# Altium PCB 枪盒设置板-20201219.PcbDoc
Units mm, origin at the board's own origin, x right, y up, seen from the top; angles counter-clockwise.
Board outline 66 x 20 mm, 2 copper layers (Top Layer, Bottom Layer); 12 components, 9 nets, 39 pads, 37 vias.
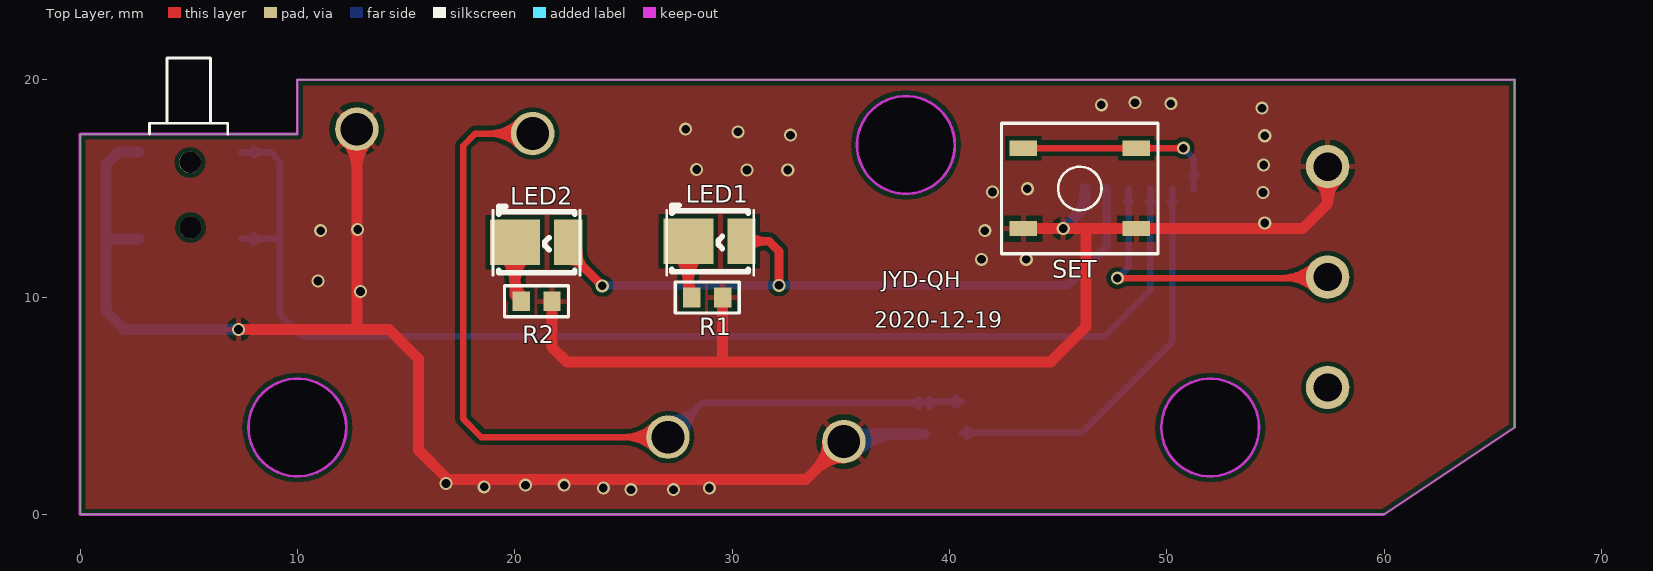
[diagram p0: Top Layer view]
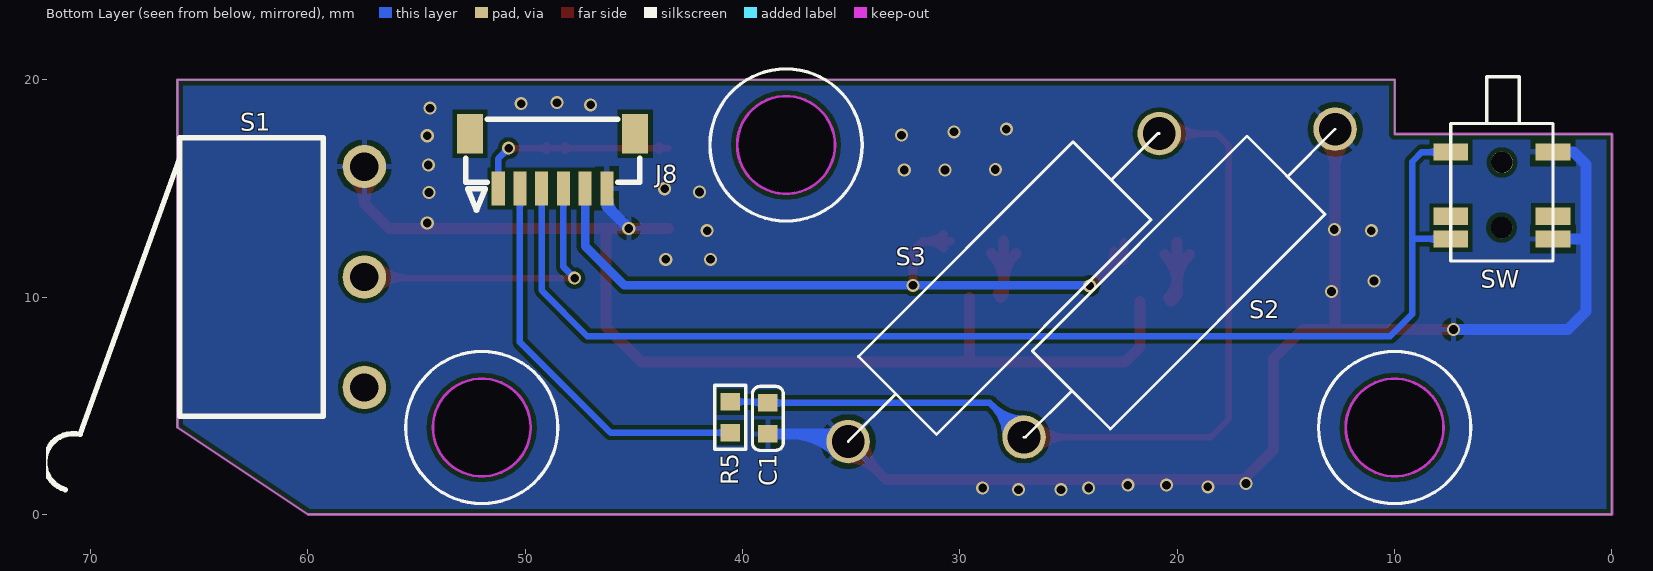
[diagram p1: Bottom Layer view, seen from below]

## Layer stack, top to bottom
Top Layer: signal copper 0.0356
Dielectric: dielectric 0.32, FR-4, Dk 4.8
Bottom Layer: signal copper 0.0356

## Board outline
0,0 60,0 66,4 66,20 10,20 10,17.5 0,17.5
cut-out: 7.75,4 ccw(c10,4) 10,1.75 ccw(c10,4) 12.25,4 ccw(c10,4) 10,6.25 ccw(c10,4)
cut-out: 35.75,17 ccw(c38,17) 38,14.75 ccw(c38,17) 40.25,17 ccw(c38,17) 38,19.25 ccw(c38,17)
cut-out: 49.75,4 ccw(c52,4) 52,1.75 ccw(c52,4) 54.25,4 ccw(c52,4) 52,6.25 ccw(c52,4)

## Design rules (kind name [scope] priority, off if disabled: settings)
Clearance [All] p1: gap=0.2
ComponentClearance [All] p1: gap=0 collisioncheckmode=3 verticalgap=0 showdistances=FALSE
HoleToHoleClearance [All] p1: gap=0 allowstackedmicrovias=TRUE
MinimumSolderMaskSliver [All] p1: minsoldermaskwidth=0
PolygonConnect [All] p1: connectstyle=Relief reliefconductorwidth=0.254 reliefentries=4 polygonreliefangle="90 Angle" airgapwidth=0.254
RoutingVias [All] p1: holewidth=0.4 width=0.6 viastyle="Through Hole" minholewidth=0.3 minwidth=0.5 maxholewidth=0.4 maxwidth=0.6
SilkToSilkClearance [All] p1: silktosilkclearance=0
SilkToSolderMaskClearance [IsPad] p1: minsilkscreentomaskgap=0 clearancetoexposedcopper=TRUE
SolderMaskExpansion [All] p1: expansion=0.102
Width [All] p1: maxlimit=2 minlimit=0.15 preferedwidth=0.2
23 further rules are at their usual default settings.

## Components (designator, comment, footprint, x,y, rotation, side; value= is the part's Value field where it differs from the comment)
C1 "100nF" 0603C 38.837,4.42 r90 bottom
J8 "设置板接口" 6P-1mm 48.743,16.256 r0 bottom
LED1 "white" 2835LED 29.21,12.573 r0 top
LED2 "white" 2835LED 21.234,12.522 r0 top
R1 "1K" 0603R 28.854,9.982 r0 top
R2 "1K" 0603R 21.006,9.804 r0 top
R5 "1K" 0603R 40.564,4.47 r90 bottom
S1 "SW" SW-TH_TC-5610H-T 57.404,10.922 r270 bottom
S2 "M1" 滚珠开关 27.051,3.556 r135 bottom
S3 "M2" 滚珠开关 20.828,17.526 r315 bottom
SET "SW" KEY_5.2*3.7*6.4 46,15 r0 top
SW "SW" ? 7.417,12.675 r180 bottom

## Footprints (in the part's own frame and the unit in brackets; to place one, negate y for a bottom-side part, rotate by r counter-clockwise, add the part's x,y. Pads: shape width x height; smd on the part's side, far side on the other; paste and mask are expansions set on the pad)
6P-1mm [mm]
  rect 0.6x1.55 smd: 1(2.5,1.262) 2(1.5,1.262) 3(0.5,1.262) 4(-0.5,1.262) 5(-1.5,1.262) 6(-2.5,1.262)
  rect 1.2x1.8 smd: 7(-3.8,-1.262) 8(3.8,-1.262)
  silkscreen extent -4,-1.94 4,2.26
0603C [mm]
  rect 0.8x0.9 smd: 1(-0.711,0) 2(0.711,0)
  silkscreen extent -1.47,-0.71 1.47,0.71, body extent -0.8,-0.4 0.8,0.4, height 0.3
0603R [mm]
  rect 0.8x0.9 smd: 1(-0.711,0) 2(0.711,0)
  silkscreen extent -1.47,-0.71 1.47,0.71, body extent -0.85,-0.4 0.85,0.4, height 0.56
2835LED [mm]
  rect 2.3x2.1 smd: 1(-1.225,0)
  rect 1.3x2.1 smd: 2(1.225,0)
  silkscreen extent -1.98,-1.4 1.53,1.65
KEY_5.2*3.7*6.4 [mm]
  rect 1.25x0.7 smd: 1(-2.6,1.85) 1(2.6,1.85) 2(-2.6,-1.85) 2(2.6,-1.85)
  silkscreen extent -3.6,-3 3.6,3
SW-TH_TC-5610H-T [mm]
  round 2 hole 1.3: 1(-5.08,0) 2(0,0) 3(5.08,0)
  silkscreen extent -6.4,-14.71 9.78,-1.9
滚珠开关 [mm]
  round 2 hole 1.5: 1(0,0) 2(20.142,-0.102)
  silkscreen extent 0,-2.54 20.14,2.54
? [mm]
  rect 1.6x0.8 smd: 1(0,0) 1(0,4) 2(4.7,0) 2(4.7,4) 3(0,1.05) 4(4.7,1.05)
  round 1 hole 1: 4(2.337,0.525) 5(2.35,3.525)
  silkscreen extent 0,-1.02 4.7,7.47

## Part data
C1: library part Cap, "100nF/6.3V X5R ±20%"
J8: library part "Header 6", "Header, 6-Pin"
LED1 LED2: library part LED
R1 R2 R5: library part R
S1 SET SW: "Switch"
S2 S3: library part SW-SPST, "Single-Pole, Single-Throw Switch"

## Via types
v1: diameter 0.6, hole 0.4, Top Layer to Bottom Layer, tented both sides, 37 vias

## Nets (pads, with @x,y where several pads share a name; then routed paths per layer and width w, separated by ;. In a path a pad name is that pad's centre, name@x,y a point inside that pad or via, vN(x,y) a via of type N, cw(c..) or ccw(c..) an arc to the next point about the centre after c; other vN are vias at no path point)
DET_KEY: J8.4 S1.2 | length 21.1
  Top Layer w0.3: v1(47.727,10.871) 57.353,10.871 S1.2 ; v1@47.833,10.765 cw(c48.089,10.509) 48.089,10.871 cw(c48.089,11.233) v1@47.833,10.977 ; 55.229,10.871 ccw(c55.229,13.097) S1.2@56.803,11.523 ; 55.475,10.871 cw(c55.475,8.993) S1.2@56.803,10.321 ; 55.953,10.871 ccw(c55.953,12.373) S1.2@57.015,11.311 ; 56.199,10.871 cw(c56.199,9.717) S1.2@57.015,10.533
  Bottom Layer w0.3: v1(47.727,10.871) 48.243,11.387 J8.4 ; v1@47.727,11.021 ccw(c47.727,11.383) 47.983,11.127 ccw(c48.239,10.871) v1@47.877,10.871 ; J8.4@48.137,14.412 cw(c47.88,14.156) 48.243,14.156 cw(c48.605,14.156) J8.4@48.349,14.412
DET_SW: J8.3 SW.1 | length 59.2
  Bottom Layer w0.3: SW.1@7.417,12.675 9.119,12.675 9.125,12.668 ; SW.1@7.417,16.675 8.751,16.675 9.195,16.231 9.195,9.22 10.211,8.204 47.142,8.204 49.243,10.304 J8.3 ; SW.1@7.994,12.498 cw(c8.42,12.071) 8.42,12.675 cw(c8.42,13.278) SW.1@7.994,12.851 ; SW.1@7.994,16.498 cw(c8.42,16.071) 8.42,16.675 cw(c8.42,17.278) SW.1@7.994,16.851 ; J8.3@49.137,14.412 cw(c48.88,14.156) 49.243,14.156 cw(c49.605,14.156) J8.3@49.349,14.412
GND: C1.1 J8.6 R1.2 R2.2 S1.1 S2.2 S3.2 SET.2 SW.2 | length 130.3
  Top Layer w0.5: v1(7.29,8.509) 14.224,8.509 15.57,7.163 15.57,2.972 16.942,1.6 33.388,1.6 S3.2 ; S2.2@12.206,17.197 cw(c10.926,15.916) 12.736,15.916 cw(c14.547,15.916) S2.2@13.267,17.197 ; 12.736,8.523 S2.2 ; R2.2 21.717,7.696 22.403,7.01 29.566,7.01 ; R1.2 29.566,7.01 ; S3.2@34.393,3.355 cw(c32.582,3.355) 33.862,2.075 cw(c35.143,0.794) S3.2@35.143,2.605 ; SET.2@43.4,13.15 46.279,13.15 ; S1.1@56.898,15.449 cw(c55.848,14.3) 57.404,14.3 ; S1.1 57.404,14.3 ; S1.1@57.91,15.449 ccw(c58.96,14.3) 57.404,14.3 ; 29.566,7.01 44.653,7.01 46.279,8.636 46.279,13.15 ; 46.279,13.15 48.6,13.15 56.254,13.15 57.404,14.3
  Bottom Layer w0.5: SW.2@2.717,12.675 1.194,12.675 ; SW.2@2.717,16.675 1.765,16.675 1.194,16.104 1.194,12.675 ; v1(7.29,8.509) 2.032,8.509 1.194,9.347 1.194,12.675 ; S3.2 35.496,3.708 C1.1 ; S3.2@35.319,3.178 cw(c36.599,1.899) 36.599,3.708 ; S3.2@35.673,2.825 cw(c37.806,0.692) 37.806,3.708 ; S3.2@35.673,3.885 ccw(c36.1,4.313) 36.1,3.708 ; v1(45.237,13.157) 46.243,14.162 J8.6 ; 45.905,13.825 ccw(c45.212,14.519) J8.6@46.193,14.519
  other v1: 25.349,1.143 27.305,1.143 24.079,1.219 28.956,1.219 18.593,1.27 20.498,1.346 22.276,1.346 16.84,1.422 12.903,10.262 10.947,10.744 41.478,11.735 43.536,11.735 11.074,13.056 41.631,13.056 12.776,13.106 54.508,13.411 54.432,14.808 41.986,14.834 43.586,14.986 30.683,15.85 32.563,15.85 28.372,15.875 54.458,16.078 54.508,17.424 32.69,17.45 30.277,17.602 27.864,17.729 54.381,18.694 46.99,18.847 50.19,18.898 48.539,18.948
NetC1_2: C1.2 R5.2 S2.1 S3.1 | length 58.7
  Top Layer w0.3: S3.1@20.227,16.925 ccw(c18.776,15.474) 18.776,17.526 ccw(c18.776,19.578) S3.1@20.227,18.127 ; S3.1@20.439,17.137 ccw(c19.5,16.198) 19.5,17.526 ccw(c19.5,18.854) S3.1@20.439,17.915 ; S3.1 18.186,17.526 17.628,16.967 17.628,4.394 18.466,3.556 S2.1 ; S2.1@26.45,2.955 ccw(c24.999,1.504) 24.999,3.556 ccw(c24.999,5.608) S2.1@26.45,4.157 ; S2.1@26.662,3.167 ccw(c25.723,2.228) 25.723,3.556 ccw(c25.723,4.884) S2.1@26.662,3.945
  Bottom Layer w0.3: S2.1 28.626,5.131 C1.2 38.887,5.182 R5.2 ; S2.1@27.051,4.106 ccw(c27.051,5.434) 27.99,4.495 ccw(c28.929,3.556) S2.1@27.601,3.556 ; S2.1@27.051,4.406 ccw(c27.051,6.458) 28.502,5.007 ccw(c29.953,3.556) S2.1@27.901,3.556 ; C1.2@38.61,4.954 ccw(c38.183,4.527) 38.183,5.131 ccw(c38.183,5.734) C1.2@38.61,5.308 ; C1.2@39.063,4.954 cw(c39.613,4.405) 39.613,5.182 ; C1.2@39.063,5.308 ccw(c39.367,5.612) 39.367,5.182 ; R5.2@40.337,5.005 ccw(c39.91,4.578) 39.91,5.182 ccw(c39.91,5.785) R5.2@40.337,5.358
NetLED1_1: LED1.1 R1.1 | length 6.4
  Top Layer w0.5: LED1.1@27.419,12.007 cw(c26.054,10.642) 27.985,10.642 cw(c29.916,10.642) LED1.1@28.551,12.007 ; 27.985,10.776 ccw(c28.887,10.776) R1.1@28.249,10.138 ; LED1.1 27.985,10.14 R1.1
NetLED2_1: LED2.1 R2.1 | length 6.9
  Top Layer w0.5: LED2.1@19.444,11.957 cw(c18.078,10.591) 20.009,10.591 cw(c21.941,10.591) LED2.1@20.575,11.957 ; 20.009,10.905 ccw(c21.345,10.905) R2.1@20.401,9.96 ; LED2.1 20.009,10.09 R2.1
SETKEY: J8.1 SET.1 | length 13.4
  Top Layer w0.3: SET.1@43.4,16.85 48.6,16.85 v1(50.765,16.85) ; SET.1@43.816,16.709 cw(c44.158,16.367) 44.158,16.85 cw(c44.158,17.333) SET.1@43.816,16.991 ; SET.1@48.184,16.709 ccw(c47.842,16.367) 47.842,16.85 ccw(c47.842,17.333) SET.1@48.184,16.991 ; SET.1@49.016,16.709 cw(c49.358,16.367) 49.358,16.85 cw(c49.358,17.333) SET.1@49.016,16.991 ; v1@50.659,16.744 ccw(c50.403,16.488) 50.403,16.85 ccw(c50.403,17.212) v1@50.659,16.956
  Bottom Layer w0.3: v1@50.765,16.7 cw(c50.765,16.338) 51.021,16.594 cw(c51.277,16.85) v1@50.915,16.85 ; v1(50.765,16.85) 51.243,16.372 J8.1 ; J8.1@51.137,15.575 ccw(c50.88,15.831) 51.243,15.831 ccw(c51.605,15.831) J8.1@51.349,15.575
SW_MOVE: J8.2 R5.1 | length 20
  Bottom Layer w0.3: R5.1 46.076,3.759 50.243,7.926 J8.2 ; R5.1@40.791,3.582 cw(c41.217,3.156) 41.217,3.759 cw(c41.217,4.363) R5.1@40.791,3.936 ; J8.2@50.137,14.412 cw(c49.88,14.156) 50.243,14.156 cw(c50.605,14.156) J8.2@50.349,14.412
V6V: J8.5 LED1.2 LED2.2 | length 36.5
  Top Layer w0.4: LED2.2@22.459,11.672 cw(c22.459,10.677) 23.163,11.381 ; LED2.2 22.459,12.085 v1(24.028,10.516) ; LED2.2@22.909,12.122 ccw(c24.087,12.122) 23.254,11.29 ; LED1.2 31.699,12.573 32.156,12.116 v1(32.156,10.541) ; LED1.2@30.753,12.255 cw(c31.521,11.487) 31.521,12.573 cw(c31.521,13.659) LED1.2@30.753,12.891
  Bottom Layer w0.4: v1@23.978,10.541 v1(32.156,10.541) 45.441,10.541 47.243,12.343 J8.5 ; v1@24.099,10.445 cw(c24.331,10.213) 24.331,10.541
pads on no net: J8.7 J8.8 S1.3 SW.3 SW.4 SW.5

## Polygon pours and split planes (outlines as drawn)
GND on Top Layer "Top Layer-No Net" (solid, remove dead copper, pour order 4): 0,0 0,19.66 0.356,20.015 65.985,20.015 66,20 66.065,19.935 66.065,0.025
GND on Bottom Layer "Top Layer-No Net" (solid, remove dead copper, pour order 3): 0,0 0,19.66 0.356,20.015 65.985,20.015 66,20 66.065,19.935 66.065,0.025

## Keep-outs
Keep-Out Layer:
  circle w0.127: c38,17 r2.25
  circle w0.127: c10,4 r2.25
  circle w0.127: c52,4 r2.25
  lines w0.127: 0,0 60,0 66,4 66,20 10,20 10,17.5 0,17.5 0,0

## Silkscreen, mask and mechanical layers (free items; w line width, h text height)
Top Overlay:
  circle w0.127: c46,15 r1
  lines w0.127: 3.2,17.5 3.2,18 6.8,18 6.8,17.5 ; 4,18 4,21 6,21 6,18 ; 19,11 19,14 ; 23,11 23,14 ; 27,11 27,14 ; 31,11 31,14
  text "JYD-QH" at 36.881,10.211 h1.27
  text "2020-12-19" at 36.551,8.331 h1.27
Bottom Overlay:
  circle w0.15: c52,4 r3.5
  circle w0.15: c10,4 r3.5
  circle w0.15: c38,17 r3.5